# Altium PCB UWB_Beacon_PCB.PcbDoc (part 2 of 2)
Units mm, origin at the board's own origin, x right, y up, seen from the top; angles counter-clockwise.
Board outline 99.75 x 83 mm, 2 copper layers (Top Layer, Bottom Layer); 63 components, 47 nets, 256 pads, 109 vias.
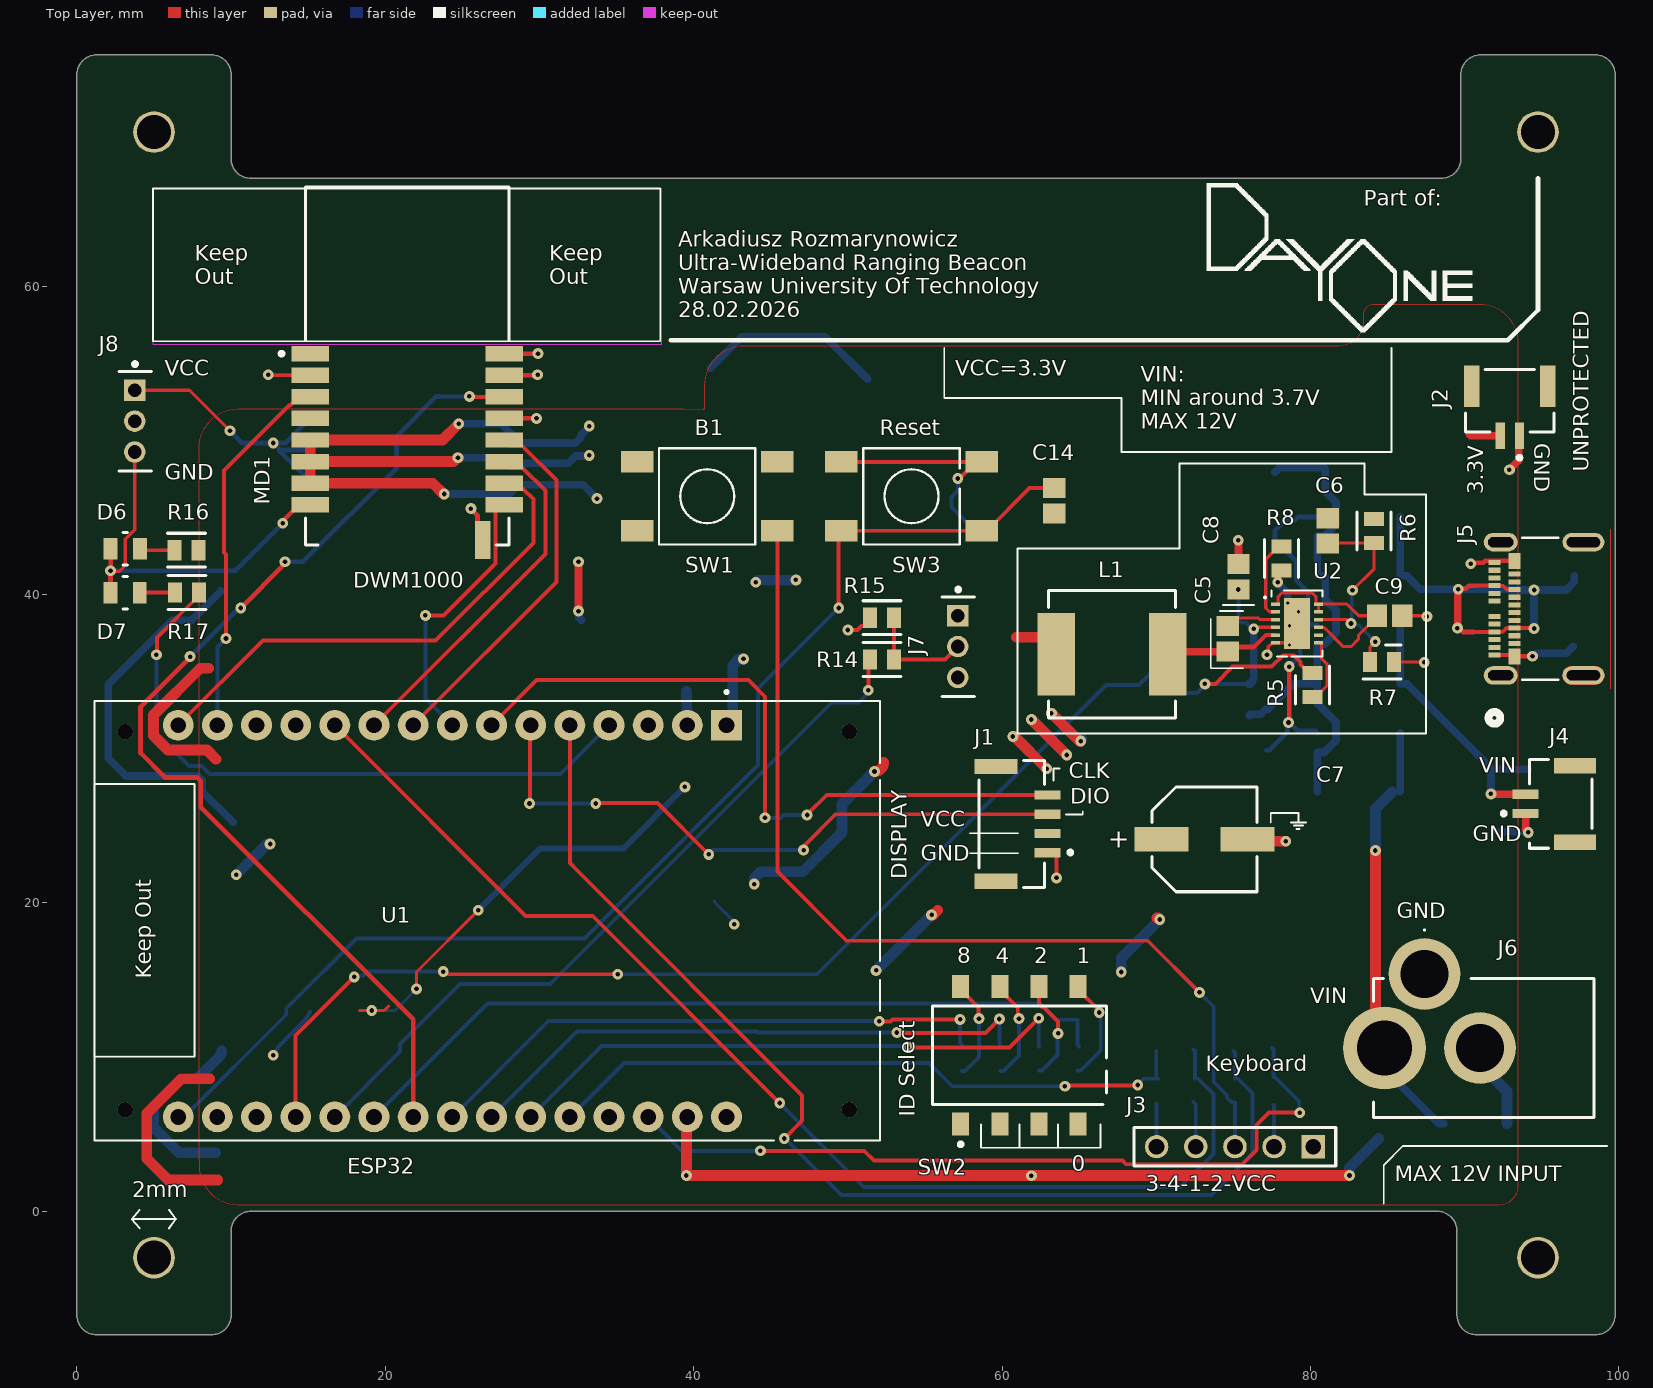
[diagram p0: Top Layer view]

## Silkscreen, mask and mechanical layers (free items; w line width, h text height) (continued)
Top Overlay: (continued)
  text "GND" at 90.531,24.015 h1.02
  text "GND" at 54.731,22.731 h1.02
  text "DISPLAY" at 53.824,21.531 h1.02 r90
  text "GND" at 85.6,19 h1.02
  text "8" at 57.081,16.081 h1.02
  text "4" at 59.581,16.081 h1.02
  text "2" at 62.081,16.081 h1.02
  text "1" at 64.831,16.081 h1.02
  text "Keep Out" at 4.836,15.081 h1.02 r90
  text "VIN" at 80,13.5 h1.02
  text "Keyboard" at 73.2,9.1 h1.02
  text "ID Select" at 54.324,6.131 h1.02 r90
  text "0" at 64.503,2.603 h1.02
  text "ESP32" at 17.531,2.431 h1.02
  text "MAX 12V INPUT" at 85.453,1.953 h1.02
  text "3-4-1-2-VCC" at 69.303,1.303 h1.02
  text "2mm" at 3.603,0.903 h1.02
Bottom Overlay:
  lines w0.12: 67.827,4.902 67.827,5.402 ; 67.852,5.402 72.327,5.402 ; 72.327,5.427 72.327,6.027 ; 74.527,6.052 74.527,5.627 79.577,5.627
  text "." at 80.547,47.203 h1.02
  text "G" at 78.174,45.331 h1.02
  text "." at 80.547,40.203 h1.02
  text "GND" at 67.174,39.081 h1.02
  text "G" at 78.174,38.081 h1.02
  text "." at 80.547,33.203 h1.02
  text "1A" at 77.231,32.331 h1.02 r270
  text "G" at 80.047,31.703 h1.02
  text "." at 80.547,26.203 h1.02
Mechanical 1:
  lines w0.12: 7.447,-8 8.726,-8 ; 7.48,-8 1.27,-8 cw(c1.27,-6.73) 0,-6.73 0,73.73 cw(c1.27,73.73) 1.27,75 8.73,75 cw(c8.73,73.73) 10,73.73 10,68.27 ccw(c11.27,68.27) 11.27,67 88.485,67 ccw(c88.485,68.27) 89.755,68.27 89.755,73.73 cw(c91.025,73.73) 91.025,75 98.485,75 cw(c98.485,73.73) 99.755,73.73 99.755,-6.73 cw(c98.485,-6.73) 98.485,-8 90.77,-8 cw(c90.77,-6.73) 89.5,-6.73 89.5,-1.27 ccw(c88.23,-1.27) 88.23,0 11.27,0 ccw(c11.27,-1.27) 10,-1.27 10,-6.73 cw(c8.73,-6.73) 8.73,-8
  lines w1.2: 0,-6.73 ccw(c1.27,-6.73) 1.27,-8 8.73,-8 ccw(c8.73,-6.73) 10,-6.73 10,-1.27 cw(c11.27,-1.27) 11.27,0 88.23,0 cw(c88.23,-1.27) 89.5,-1.27 89.5,-6.73 ccw(c90.77,-6.73) 90.77,-8 98.485,-8 ccw(c98.485,-6.73) 99.755,-6.73 99.755,73.73 ccw(c98.485,73.73) 98.485,75 91.025,75 ccw(c91.025,73.73) 89.755,73.73 89.755,68.27 cw(c88.485,68.27) 88.485,67 11.27,67 cw(c11.27,68.27) 10,68.27 10,73.73 ccw(c8.73,73.73) 8.73,75 1.27,75 ccw(c1.27,73.73) 0,73.73 0,-6.73

## Text inside footprints (layer, text, board x,y; h text height)
C7: Top Overlay "+" at 68.277,24.627 h1.22 r180
F1: Bottom 3D Body "*" at 76.675,33.793 h1.02 r90
SW1: Top 3D Body "*" at 43.811,45.018 h1.02 r180
SW3: Top 3D Body "*" at 57.061,45.018 h1.02 r180